# Altium PCB PCB8.PcbDoc
Units mil, origin at the board's own origin, x right, y up, seen from the top; angles counter-clockwise.
Board outline 3925 x 3930 mil, 2 copper layers (Top Layer, Bottom Layer); 49 components, 42 nets, 160 pads, 35 vias.
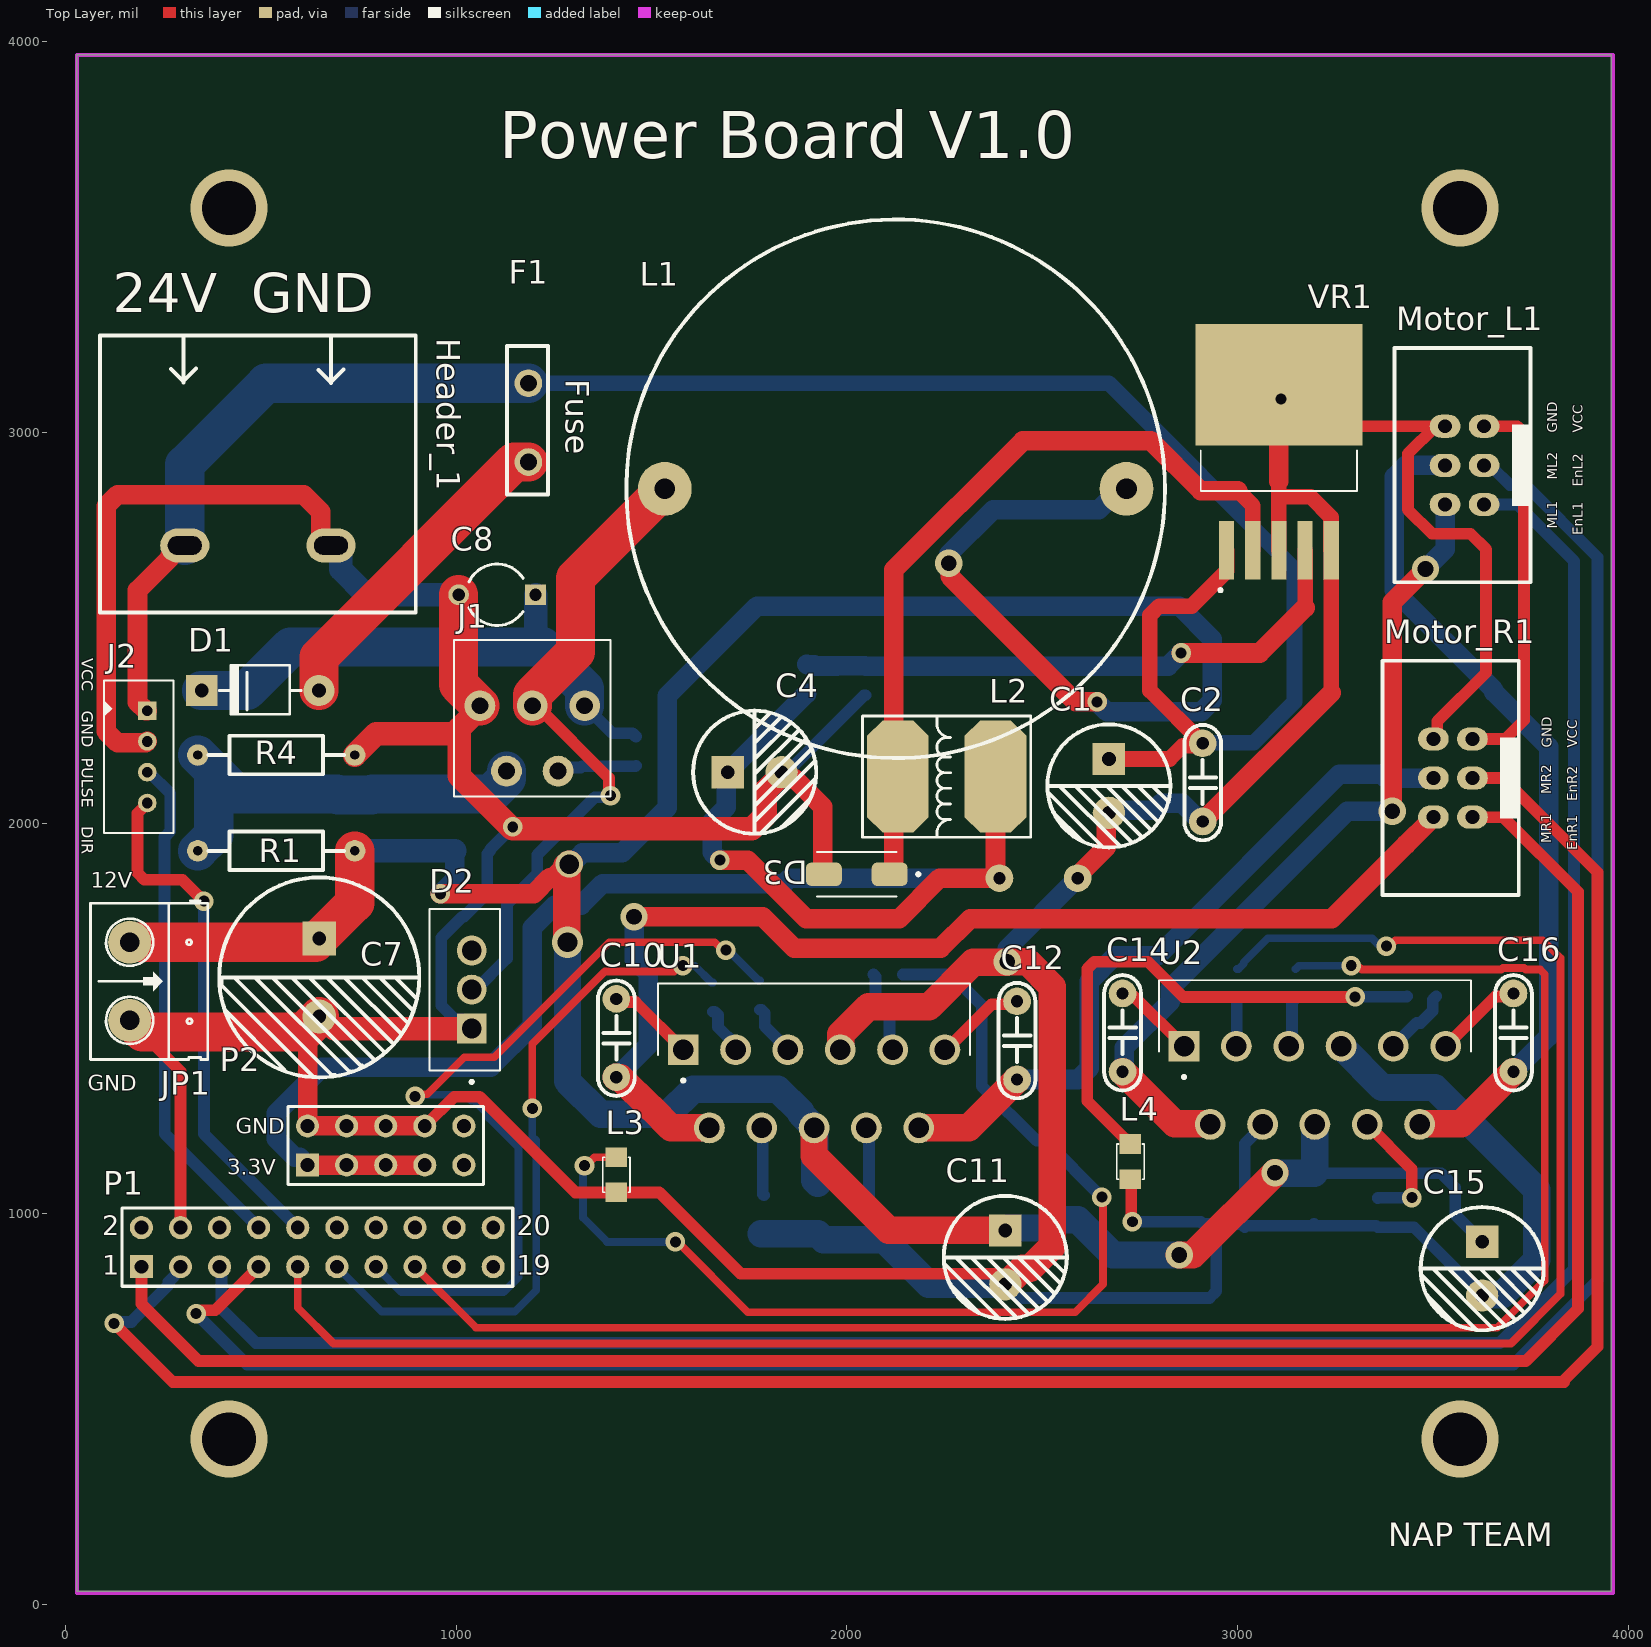
[diagram p0: Top Layer view]
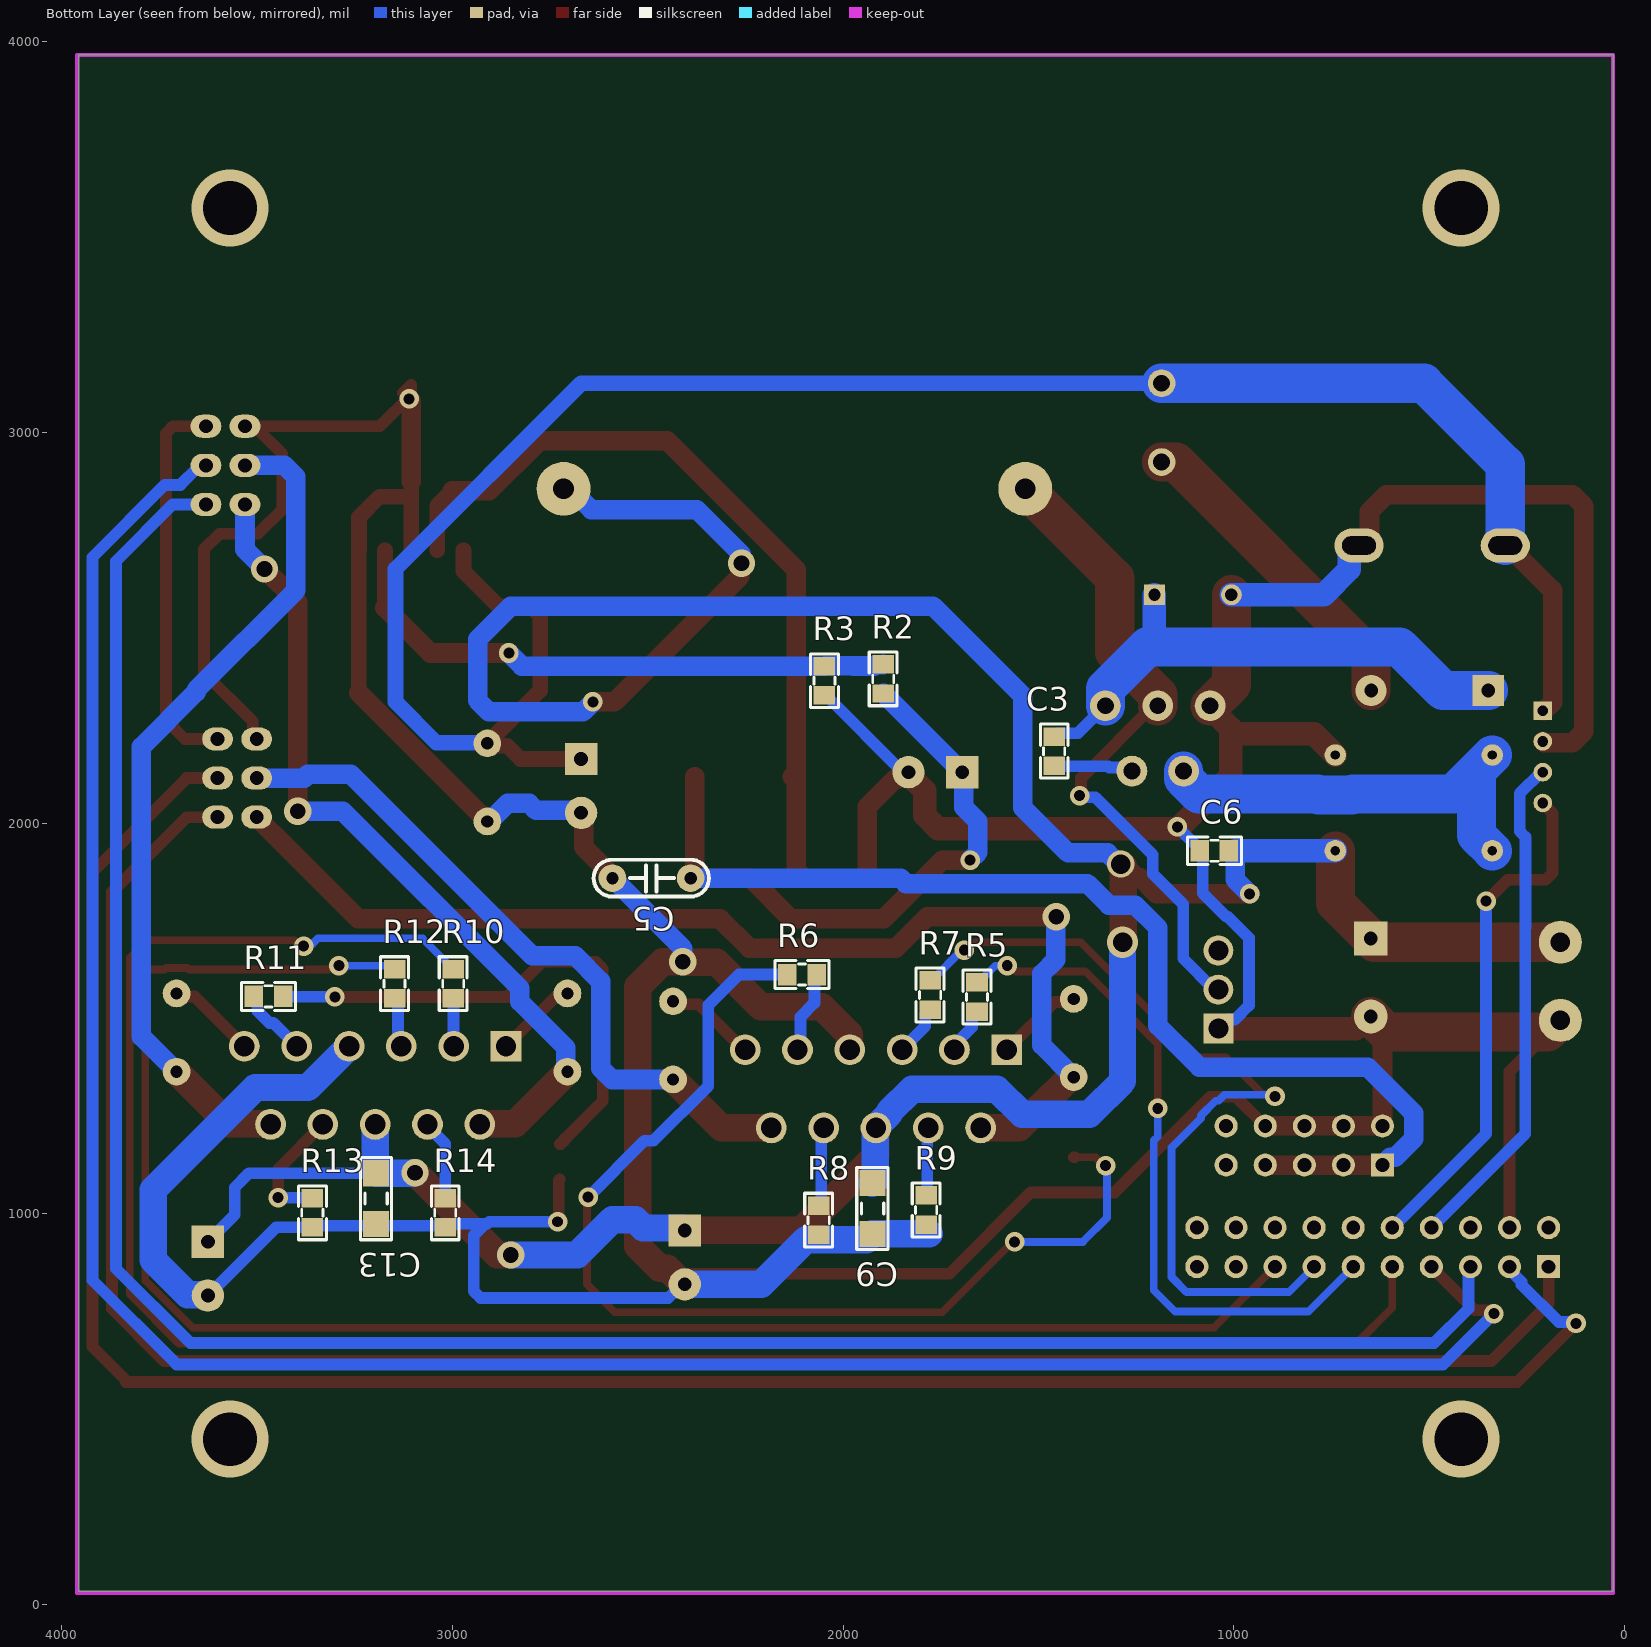
[diagram p1: Bottom Layer view, seen from below]
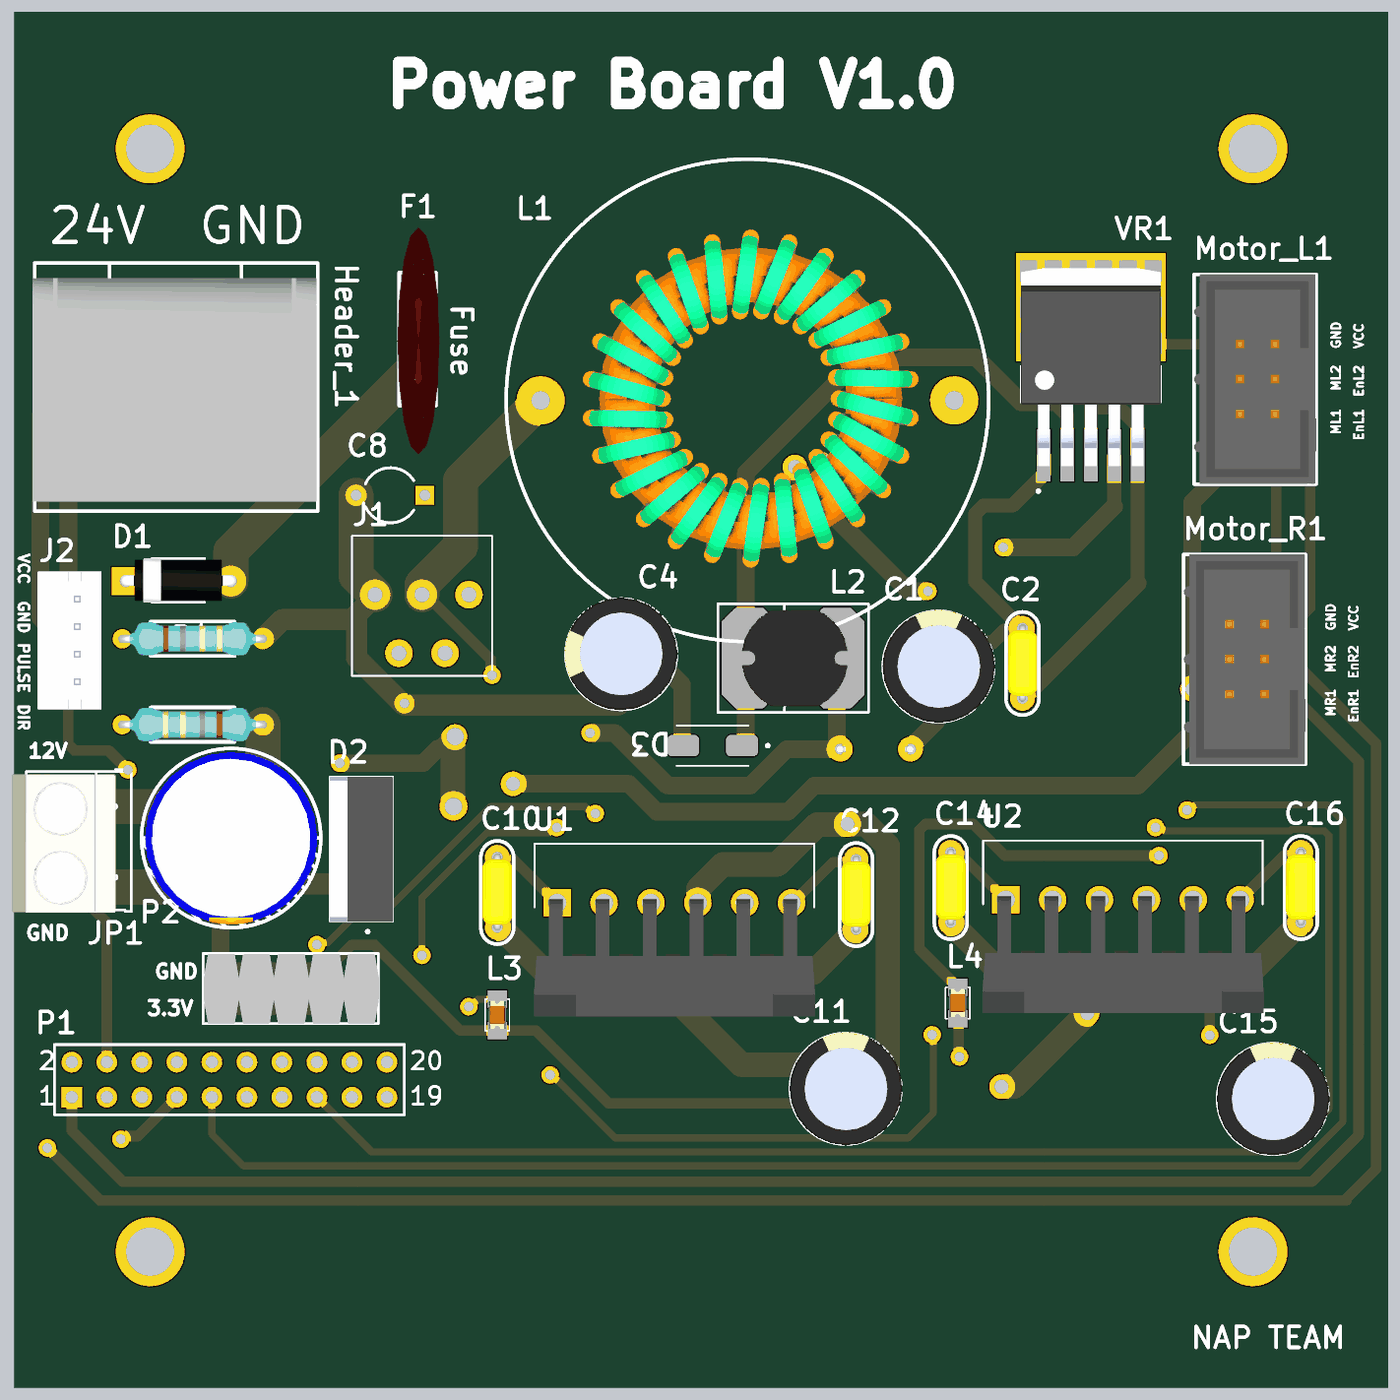
[diagram p2: 3D render of the assembled board from above, using the file's embedded part models]
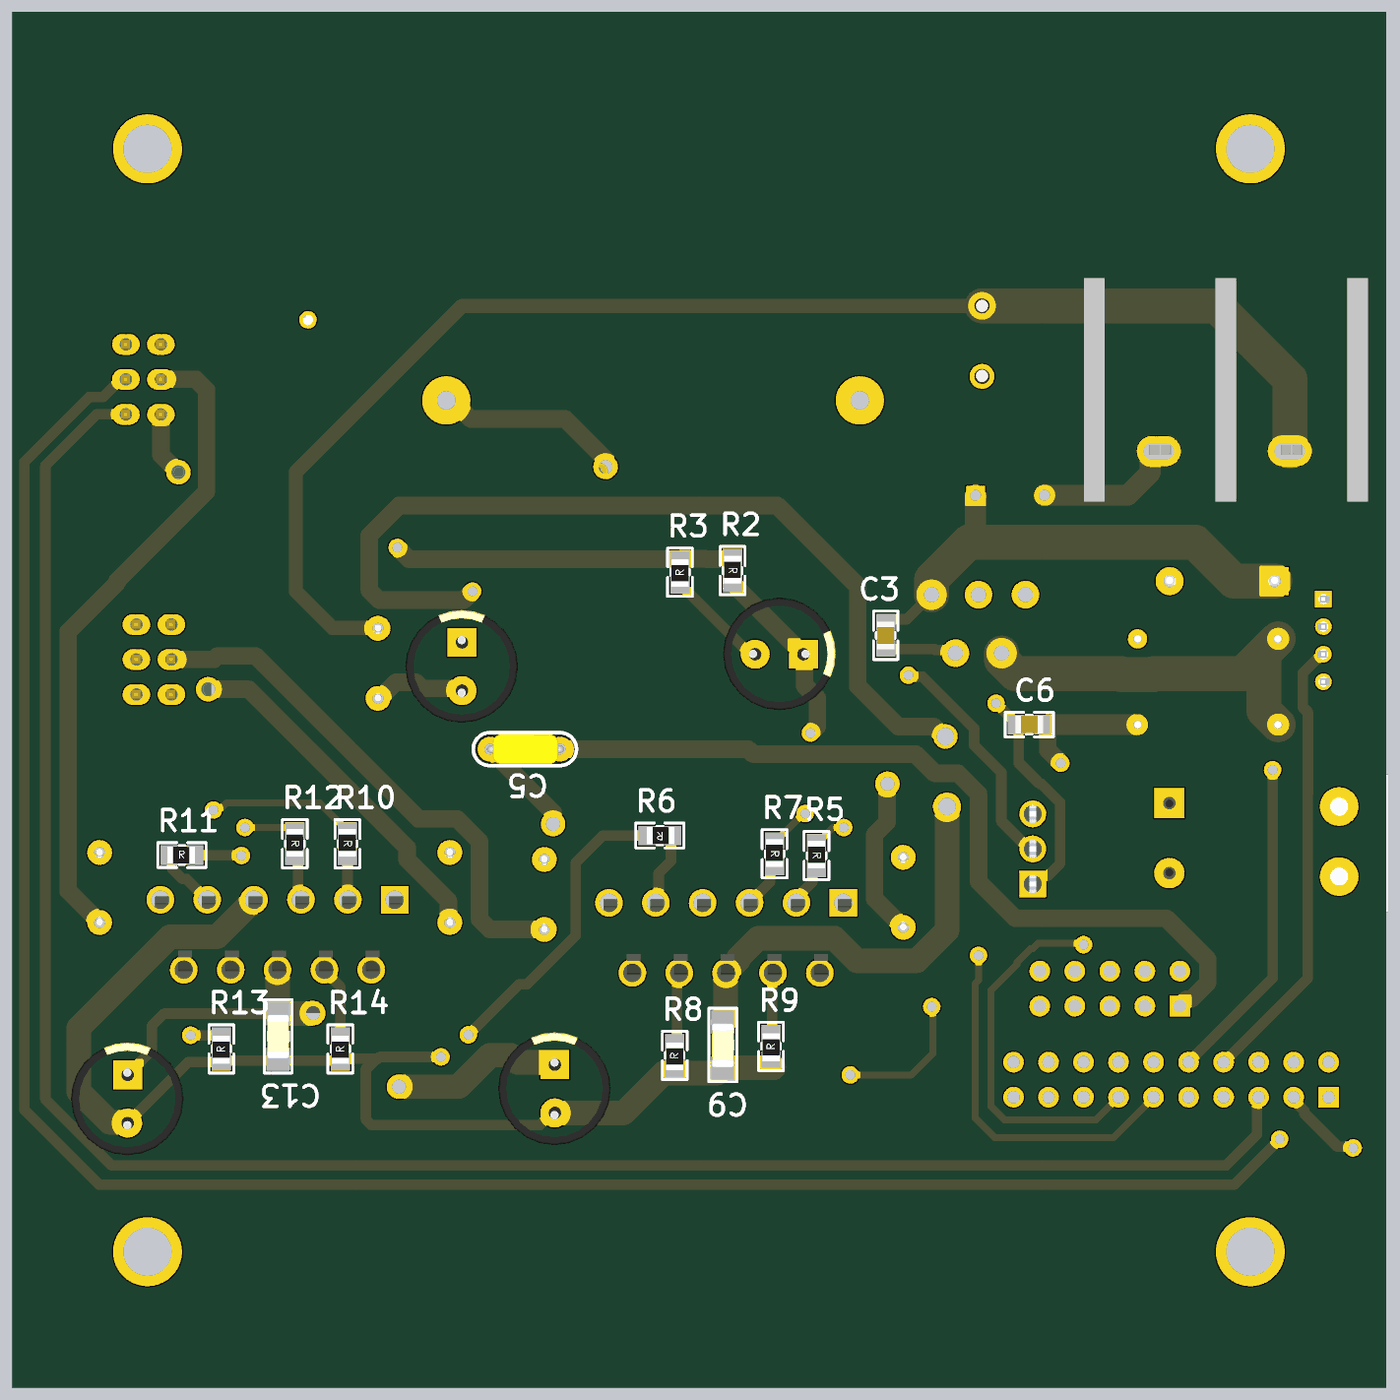
[diagram p3: 3D render of the assembled board from below, using the file's embedded part models]

## Layer stack, top to bottom
Top Solder: solder mask 0.4, Solder Resist, Dk 3.5
Top Layer: signal copper 1.4
Dielectric 1: dielectric 12.6, FR-4, Dk 4.8
Bottom Layer: signal copper 1.4
Bottom Solder: solder mask 0.4, Solder Resist, Dk 3.5

## Board outline
30,35 3955,35 3955,3965 30,3965

## Design rules (kind name [scope] priority, off if disabled: settings)
Clearance [All] p1: gap=20 ignorepadtopadclearanceinfootprint=TRUE
Height [All] p1: minheight=0 maxheight=1000 prefheight=10
PlaneClearance [All] p1: clearance=25
PolygonConnect [All] p1: connectstyle=Relief reliefconductorwidth=10 reliefentries=4 polygonreliefangle="90 Angle" airgapwidth=10
RoutingVias [All] p1: holewidth=28 width=50 viastyle="Through Hole" minholewidth=28 minwidth=50 maxholewidth=28 maxwidth=50
SolderMaskExpansion [All] p1: expansion=4 istentingtop=FALSE
Width [All] p1: maxlimit=150 minlimit=10 preferedwidth=40
28 further rules are at their usual default settings.

## Components (designator, comment, footprint, x,y, rotation, side; value= is the part's Value field where it differs from the comment)
C1 "470uF" "tu hoa 8mm" 2670,2095 r270 top
C2 "100nF" "tu tantalum dip5.08" 2910,2103.94 r270 top
C3 "105" "tu 0805" 1460,2183.94 r270 bottom
C4 "470uF" "tu hoa 8mm" 1763.9,2130 r0 top
C5 "100nF" "tu tantalum dip5.08" 2490,1858.94 r0 bottom
C6 "105" "tu 0805" 1050,1928.94 r0 bottom
C7 "1000uF" "tu hoa 13mm" 650,1605 r270 top
C8 "Cap2" CAPR5-4X5 1105,2583.94 r180 top value=470uF
C9 "100pF" "tu 1206" 1925,1013.94 r270 bottom
C10 "10nF" "tu tantalum dip5.08" 1410,1450 r270 top
C11 "220nF" "tu hoa 8mm" 2405,888.9 r270 top
C12 "10nF" "tu tantalum dip5.08" 2435,1443.94 r270 top
C13 "100pF" "tu 1206" 3195,1038.94 r270 bottom
C14 "10nF" "tu tantalum dip5.08" 2705,1463.94 r270 top
C15 "220nF" "tu hoa 8mm" 3625,860 r270 top
C16 "10nF" "tu tantalum dip5.08" 3705,1463.94 r270 top
D1 "100v" "DIODE 1A" 699.21,2338.94 r0 top
D2 "MBR10100CTH" TO254P1050X476X2020-3 1022.17,1573.94 r90 top
D3 "B340A-13-F" DIOM5226X240N 2025,1868.94 r180 top
F1 "10A 16V" Auto_Fuse 1185,3140 r270 top
Header_1 "Component_1" CONN-TH_2P-P9.50_HB9500-9.5-2P 492.99,2710 r180 top
J1 "XL4016" LM2576T2 1195,2300 r0 top
J2 "Stepper" CON4_78_B4B-PH-K-S(LF)(SN) 210,2287.48 r90 top
JP1 "Header 2_1" HED2 165,1695 r270 top value="Header 2"
L1 "330uH" IND_30.1MM_TH 1533.9,2855 r0 top
L2 "47uH SMD" "Cuon Cam 7x7x5" 2105,2118.94 r270 top
L3 "LED 0805" LED-0805-Red 1410,1145 r270 top
L4 "LED 0805" LED-0805-Red 2725,1178.94 r270 top
Motor_L1 "Polulu_854" "CON6_100_59D78_TH_ST - duplicate" 3630,2815 r270 top
Motor_R1 "Polulu_854" "CON6_100_59D78_TH_ST - duplicate" 3600,2015 r270 top
P1 "Header 10X2" HDR2X10 195,865 r0 top
P2 "Header 5X2" HDR2X5 620,1125 r0 top
R1 "15k" "tro vach 1/4w" 540,1928.94 r0 top
R2 "2.7k" "tro smd 0805" 1895,2368.94 r270 bottom
R3 "1.5k" "tro smd 0805" 2050,2363.94 r90 bottom
R4 "1.8k" "tro vach 1/4w" 540,2173.94 r180 top
R5 "3.3k" "tro smd 0805" 1655,1555 r270 bottom
R6 "330R" "Tro SMD 0805" 2105,1610 r0 bottom
R7 "3.3k" "tro smd 0805" 1775,1560 r270 bottom
R8 "10k" "tro smd 0805" 2065,983.94 r90 bottom
R9 "3.3k" "tro smd 0805" 1790,1010 r90 bottom
R10 "3.3k" "tro smd 0805" 2995,1588.94 r270 bottom
R11 "330R" "Tro SMD 0805" 3470,1558.94 r180 bottom
R12 "3.3k" "tro smd 0805" 3145,1588.94 r270 bottom
R13 "10k" "tro smd 0805" 3360,1002.83 r90 bottom
R14 "3.3k" "tro smd 0805" 3020,1002.83 r90 bottom
U1 "LMD18200T/NOPB" LMD18200 1581.14,1420 r0 top
U2 "LMD18200T/NOPB" LMD18200 2862.28,1428.94 r0 top
VR1 "LM2596S-5.0" TO170P1524X483-6N 3105,2950 r90 top

## Footprints (in the part's own frame and the unit in brackets; to place one, negate y for a bottom-side part, rotate by r counter-clockwise, add the part's x,y. Pads: shape width x height; smd on the part's side, far side on the other; paste and mask are expansions set on the pad)
Auto_Fuse [mm]
  round 1.8 hole 1.1: 1(0.381,0) 2(5.5,0)
  silkscreen extent -2.03,-1.4 7.62,1.27, body extent -5.33,-1.52 11.18,1.52, height 26.91
CAPR5-4X5 [mm] "Capacitor; 2 Leads"
  rect 1.35x1.35 hole 0.8: 1(-2.5,0)
  round 1.35 hole 0.8: 2(2.5,0)
  silkscreen extent -1.69,-2 1.82,2
CON4_78_B4B-PH-K-S(LF)(SN) [mm] "JST TH"
  rect 1.208x1.208 hole 0.7: 1(0,0)
  round 1.208 hole 0.7: 2(-2,0) 3(-4,0) 4(-6,0)
  silkscreen extent -7.95,-1.7 1.95,2.8, body extent -7.95,-1.7 1.95,2.8, height 6
"CON6_100_59D78_TH_ST - duplicate" [mm] "6 PIN IDC Straight"
  oval 1.5x2 hole 0.9: 1(0,0) 2(-2.54,0) 3(-5.08,0) 4(-5.08,-2.54) 5(-2.54,-2.54) 6(0,-2.54)
  silkscreen extent -10.16,-5.84 5.06,3.05, body extent -10.16,-5.84 5.06,3.01, height 9.17
CONN-TH_2P-P9.50_HB9500-9.5-2P [mm]
  oval 3.2x2.2 hole 1.2 slot 2.2 at 0 deg paste+0 mask+0.051: 1(4.75,0) 2(-4.75,0)
  silkscreen extent -10.26,-13.65 10.26,4.35, body extent -10.19,-12.54 10.41,3.65, height 19.04
"Cuon Cam 7x7x5" [mm] "Cuon Cam 7x7x5"
  oct 7.3x4 smd: 1(0,0.635) 2(0,6.985)
  silkscreen extent -3.94,-1.65 3.94,9.27, body extent -3.5,0.07 3.5,7.8, height 5.02
"DIODE 1A" [mil] "Diode 1A"
  round 80 hole 35: 1(-50,0)
  rect 80x80 hole 35: 2(-350,0)
  silkscreen extent -305,-61 -95,65, body extent -366,-61 -34,65, height 122
DIOM5226X240N [mm]
  rrect50% 2.33x1.55 smd: A(2.135,0) C(-2.135,0)
  silkscreen extent -4.1,-1.46 2.6,1.46
HDR2X5 [mm] "Connector; Header; 5x2 Position"
  rect 1.5x1.5 hole 0.9: 1(0,0)
  round 1.5 hole 0.9: 2(0,2.54) 3(2.54,0) 4(2.54,2.54) 5(5.08,0) 6(5.08,2.54) 7(7.62,0) 8(7.62,2.54) 9(10.16,0) 10(10.16,2.54)
  silkscreen extent -1.27,-1.27 11.43,3.81, body extent -1.22,-1.28 11.48,3.8, height 9.27
HDR2X10 [mm] "Connector; Header; 10x2 Position"
  rect 1.5x1.5 hole 0.9: 1(0,0)
  round 1.5 hole 0.9: 2(0,2.54) 3(2.54,0) 4(2.54,2.54) 5(5.08,0) 6(5.08,2.54) 7(7.62,0) 8(7.62,2.54) 9(10.16,0) 10(10.16,2.54) 11(12.7,0) 12(12.7,2.54) 13(15.24,0) 14(15.24,2.54) 15(17.78,0) 16(17.78,2.54) 17(20.32,0) 18(20.32,2.54) 19(22.86,0) 20(22.86,2.54)
  silkscreen extent -1.27,-1.27 24.13,3.81
HED2 [mil] "Header 2, 2 pin, hight 300mil, Pin to Pin 200, Colour Green"
  round 110 hole 50: 1(0,0) 2(200,0)
  silkscreen extent -106,-100 300,200, body extent -92,-140 302,155, height 394
IND_30.1MM_TH [mm]
  round 3.5 hole 1.35: 1(0,0) 2(30,0)
  silkscreen extent -2.5,-17.5 32.5,17.5, body extent 3.06,-12.14 27.42,12.39, height 14.28
LED-0805-Red [mil]
  rect 50x55 smd: 1(0,0) 2(90,0)
  silkscreen extent 0,-35 90,35, body extent 5,-25 85,25, height 43
LM2576T2 [mm]
  round 2 hole 1.1: 1(-3.404,0) 2(-1.676,-4.242) 3(0,0) 4(1.676,-4.242) 5(3.404,0)
  silkscreen extent -5.08,-5.89 5.08,4.27
LMD18200 [mm]
  rect 2x2 hole 1.33: 1(0,0)
  round 2 hole 1.33: 2(1.7,-5.08) 3(3.4,0) 4(5.1,-5.08) 5(6.8,0) 6(8.5,-5.08) 7(10.2,0) 8(11.9,-5.08) 9(13.6,0) 10(15.3,-5.08) 11(17,0)
  silkscreen extent -1.64,-2.1 18.64,4.29, body extent -1.69,-8.24 18.71,0.25, height 17.79
TO170P1524X483-6N [mm]
  rect 3.79x0.99 smd: 1(-6.4,3.4) 2(-6.4,1.7) 3(-6.4,0) 4(-6.4,-1.7) 5(-6.4,-3.4)
  rect 7.88x10.84 smd paste-6: 6(4.35,0)
  silkscreen extent -9.1,-5.08 0.09,5.08, body extent -7.18,-5.08 7.18,5.08, height 4.65
TO254P1050X476X2020-3 [mm]
  rect 1.94x1.94 hole 1.29: 1(-2.54,-0.453)
  round 1.94 hole 1.29: 2(0,-0.453) 3(2.54,-0.453)
  silkscreen extent -6.1,-2.29 5.25,2.29, body extent -5.25,-2.29 5.25,2.3, height 20.2
"tro smd 0805" [mm]
  rect 1.2x1.4 smd: 1(-0.946,-0.061) 2(0.954,-0.061)
  silkscreen extent -1.75,-0.97 1.75,0.84, body extent -1.56,-0.76 1.44,0.64, height 0.53
"Tro SMD 0805" [mm]
  rect 1.2x1.4 smd: 1(-0.946,-0.061) 2(0.954,-0.061)
  silkscreen extent -1.75,-0.97 1.75,0.84, body extent -1.56,-0.76 1.44,0.64, height 0.53
"tro vach 1/4w" [mm]
  round 1.4 hole 0.6: 1(-5.1,0) 2(5.1,0)
  silkscreen extent -4.39,-1.25 4.42,1.25, body extent -5.38,-1.2 5.38,1.2, height 2.41
"tu 0805" [mm] "Compoment SMD 80x50mil"
  rect 1.2x1.4 smd: 1(-0.946,-0.003) 2(0.954,-0.003)
  silkscreen extent -1.75,-0.89 1.75,0.89, body extent -1.01,-0.64 1.01,0.63, height 0.61
"tu 1206" [mm]
  rect 1.7x1.7 smd: 1(-1.65,0) 2(1.65,0)
  silkscreen extent -2.67,-1.02 2.67,1.02, body extent -1.57,-0.8 1.63,0.8, height 0.94
"tu hoa 8mm" [mm]
  rect 2.1x2.1 hole 0.9: 1(-1.75,0)
  round 2.1 hole 0.9: 2(1.75,0)
  silkscreen extent -4,-4 4,4, body extent -4.1,-4.07 4.1,4.13, height 13.81
"tu hoa 13mm" [mm]
  rect 2.2x2.2 hole 0.9: 1(-2.54,0)
  round 2.2 hole 0.9: 2(2.54,0)
  silkscreen extent -6.5,-6.5 6.5,6.5, body extent -6.25,-6.25 6.26,6.25, height 23.02
"tu tantalum dip5.08" [mm]
  round 1.8 hole 0.8: 1(-2.54,0) 2(2.54,0)
  silkscreen extent -3.74,-1.2 3.76,1.2, body extent -2.82,-1.08 2.77,1.08, height 6.27

## Part data
C1 C4: library part "Tu Hoa 470uF 16V 8x11", "Cắm", Chung_Loai=Cắm, Don_Vi=Con, Ma_Hang=MH006550, So_Chan=2, Ten_Linh_Kien="Tụ Hóa 470uF 16V 8x11MM"
C2 C5: library part "Tu tantalum 100nF 50V 20% DIP5.08", "Cắm", Chung_Loai=Cắm, Don_Vi=Con, Ma_Hang=MH003955, So_Chan=2, Ten_Linh_Kien="Tụ tantalum 104-100nF 50V 20% DIP5.08 (sứ vàng)(10PCS)"
C3 C6: library part "Tu 0805 105 50V 10%", "Dán", Chung_Loai=Dán, Don_Vi=Con, Ma_Hang=MH004552, So_Chan=2, Ten_Linh_Kien="Tụ 0805 105-1uF 10% 50V"
C7: library part "Tu Hoa 1000uF 50V 13x26", "Cắm", Chung_Loai=Cắm, Don_Vi=Con, Ma_Hang=MH006619, So_Chan=2, Ten_Linh_Kien="Tụ Hóa 1000uF 50V"
C8: "Capacitor", PackageDescription="Capacitor; 2 Leads", PackageReference=CAPR5-4X5, Published=23-Sep-2002, Publisher="Altium Limited"
C9 C13: library part "Tu 1206 100pF 50V 5%", "Dán", Chung_Loai=Dán, Don_Vi=Con, Ma_Hang=MH008101, So_Chan=2, Ten_Linh_Kien="Tụ 1206 100P 5% 50V"
C10 C12 C14 C16: library part "Tu tantalum 10nF DIP5.08", "Cắm", Chung_Loai=Cắm, Don_Vi=Con, Ma_Hang=MH002105, So_Chan=2, Ten_Linh_Kien="Tụ tantalum 103-10nF DIP5.08 (sứ vàng)(10PCS)"
C11 C15: library part "Tu Hoa 220uF 35V 8x12", "Cắm", Chung_Loai=Cắm, Don_Vi=Con, Ma_Hang=MH006553, So_Chan=2, Ten_Linh_Kien="Tụ Hóa 220uF 35V 8x12MM"
D1: library part "Diode 1N4007", "Cắm", Chung_Loai=Cắm, Don_Vi=Con, Ma_Hang=MH001063, Ten_Linh_Kien="Diode 1N4007 1A (DIP)"
D2: "10A, 100V, Schottky Rectifier", Package="TO-220AB Taiwan Semiconductor", Availability="Not in stock", Check_prices=https://www.snapeda.com/parts/MBR10100CTH/Taiwan+Semiconductor/view-part/?ref=eda, MF="Taiwan Semiconductor", MP=MBR10100CTH, Price=None, SnapEDA_Link=https://www.snapeda.com/parts/MBR10100CTH/Taiwan+Semiconductor/view-part/?ref=snap
D3: "Diode Schottky 40V 3A Surface Mount SMA", Package="DO-214 Diodes Inc.", Availability=Unavailable, MF="Diodes Inc.", MP=B340A-13-F, Price=None, SnapEDA_Link=https://www.snapeda.com/parts/B340A-13-F/Diodes%20Inc./view-part/78704/?ref=snap
F1: library part Auto_Fuse_10A
J1: "The XL4016 is a 180 KHz fixed frequencyPWM buck (step-down) DC/DC converter,capable of driving a 8A load with highefficiency, low ripple and excellent line and load regulation.", Package=None, Availability="Not in stock", Check_prices=https://www.snapeda.com/parts/XL4016/XLSEMI/view-part/?ref=eda, MF=XLSEMI, MP=XL4016, Price=None, SnapEDA_Link=https://www.snapeda.com/parts/XL4016/XLSEMI/view-part/?ref=snap
J2: library part CON-PLG_4X1-78-ST-TH, "Connector Header Through Hole 4 position 0.079\" (2.00mm)", Alternate Part Number-1=NA, Case/Package=TH, Crimp Part Number=ASPHSPH24K51, Manufacturer=JST, Manufacturer Part Number=B4B-PH-K-S(LF)(SN), Mating Part Number=PHR-4, Supplier Part Number-1=NA, Supplier-1="SP Road"
JP1: "Header, 2-Pin", Manufacturer="Generic Components", Class=Connector
L1: library part IND_330uH-10A-TH, "330uH-10A-CHINESE INDUCTOR", Alternate Part Number-1=NA, Case/Package=TH, Manufacturer=NA, Manufacturer Part Number=NA, Supplier Part Number-1=NA, Supplier-1="SP ROAD"
L2: library part "CUON CAM 47uH SMD", "Dán", Chung_Loai=Dán, Don_Vi=Con, Ma_Hang=MH004211, Ten_Linh_Kien="Cuộn Cảm 47uH 7x7x4MM CD74R"
L3 L4: library part "LED 0805 Do", "Dán", Chung_Loai=Dán, Don_Vi=Con, Ma_Hang=MH000897, Ten_Linh_Kien="LED 0805 Màu Đỏ (Red)"
Motor_L1 Motor_R1: library part CON-PLG_2X3-100-ST-TH, "6-pin shrouded male headers are great general-purpose connectors and are perfect for AVR ISP programming", Alternate Part Number-1=NA, Case/Package=TH, Manufacturer=NA, Manufacturer Part Number=NA, Supplier Part Number-1=Polulu_854, Supplier-1=Polulu
P1: "Header, 10-Pin, Dual row", LatestRevisionDate=17-Jul-2002, LatestRevisionNote="Re-released for DXP Platform.", Publisher="Altium Limited"
P2: "Header, 5-Pin, Dual row", LatestRevisionDate=17-Jul-2002, LatestRevisionNote="Re-released for DXP Platform.", Publisher="Altium Limited"
R1: library part "Tro Vach 1/4W 5% 15k", "Cắm", Chung_Loai=Cắm, Don_Vi=Con, Ma_Hang=MH007288, So_Chan=2, Ten_Linh_Kien="Trở Vạch 1/4w 5% 15k"
R2: library part "Tro 0805 5% 2.7k", "Dán", Chung_Loai=Dán, Don_Vi=Con, Ma_Hang=MH005238, So_Chan=2, Ten_Linh_Kien="Trở 0805 5% 2.7k"
R3: library part "Tro 0805 5% 1.5k", "Dán", Chung_Loai=Dán, Don_Vi=Con, Ma_Hang=MH005232, So_Chan=2, Ten_Linh_Kien="Trở 0805 5% 1.5k"
R4: library part "Tro Vach 1/4W 5% 1.8k", "Cắm", Chung_Loai=Cắm, Don_Vi=Con, Ma_Hang=MH007285, So_Chan=2, Ten_Linh_Kien="Trở Vạch 1/4w 5% 1.8k"
R5 R7 R9 R10 R12 R14: library part "Tro 0805 5% 3.3k", "Dán", Chung_Loai=Dán, Don_Vi=Con, Ma_Hang=MH005305, So_Chan=2, Ten_Linh_Kien="Trở 0805 5% 3.3k"
R6 R11: library part "Tro 0805 5% 330R", "Dán", Chung_Loai=Dán, Don_Vi=Con, Ma_Hang=MH005337, So_Chan=2, Ten_Linh_Kien="Trở 0805 5% 330R"
R8 R13: library part "Tro 0805 5% 10k", "Dán", Chung_Loai=Dán, Don_Vi=Con, Ma_Hang=MH005239, So_Chan=2, Ten_Linh_Kien="Trở 0805 5% 10k"
U1 U2: Package=None, Availability=Unavailable, MP=LMD18200T/NOPB, Price=None
VR1: "SIMPLE SWITCHER&reg; 4.5V to 40V, 3A Low Component Count Step-Down Regulator", Package="TO-263-5 Texas Instruments", Availability="In Stock", Check_prices=https://www.snapeda.com/parts/LM2596S-5.0/NOPB/Texas+Instruments/view-part/?ref=eda, MF="Texas Instruments", MP=LM2596S-5.0/NOPB, Price=None, Purchase-URL=https://pricing.snapeda.com/search/part/LM2596S-5.0/NOPB/?ref=eda, SnapEDA_Link=https://www.snapeda.com/parts/LM2596S-5.0/NOPB/Texas+Instruments/view-part/?ref=snap

## Via types
v1: diameter 50, hole 28, Top Layer to Bottom Layer, 22 vias
v2: diameter 70, hole 40, Top Layer to Bottom Layer, 7 vias
v3: diameter 196.85, hole 137.8, Top Layer to Bottom Layer, 4 vias
v4: diameter 80, hole 50, Top Layer to Bottom Layer, 1 vias
v5: diameter 70, hole 50, Top Layer to Bottom Layer, 1 vias

## Nets (pads, with @x,y where several pads share a name; then routed paths per layer and width w, separated by ;. In a path a pad name is that pad's centre, name@x,y a point inside that pad or via, vN(x,y) a via of type N, cw(c..) or ccw(c..) an arc to the next point about the centre after c; other vN are vias at no path point)
3.3V: C4.1 C5.1 L2.2 P2.1 P2.3 P2.5 P2.7 R2.2 | length 4540.2
  Top Layer w50: P2.1 P2.3 P2.7 ; v1(1675,1905) 1746.07,1905 1896.07,1755 2133.27,1755 2237.21,1858.94 C5.1 2390,1864.58 2380,1874.58 L2.2 ; P2.7 P2.5 P2.7
  Bottom Layer w50: P2.1 599.53,1145.47 587.06,1145.47 540.47,1192.06 540.47,1257.94 658.03,1375.5 1088.65,1375.5 1195,1481.85 1195,1732.28 1252.72,1790 1320,1790 1375,1845 1839.07,1845 1853.01,1858.94 C5.1 ; v1(1675,1905) 1655,1925 1655,2003.94 1691.71,2040.65 1691.71,2126.71 C4.1 ; C4.1@1698.05,2126.95 1712.44,2141.34 1712.44,2147.59 1894.83,2329.98 1896.21,2331.36 R2.2
+12: C6.1 C7.1 C9.1 C11.1 C13.1 C15.1 JP1.1 L1.2 R1.2 U1.6 U2.6 | length 8856.1
  Top Layer w50: v1(960,1818.94) 1198.43,1818.94 1239.57,1860.07 1249.16,1860.07 1284.09,1895 v5(1289.5,1895) ; v2(2260,2665) 2263.83,2661.17 2263.83,2631.17 2585,2310 v1(2640,2310)
  Top Layer w70: v4(1285,1695) 1285,1697.71 1283.52,1699.19 1283.52,1889.02 v5(1289.5,1895) ; U1.6 1915.79,1149.21 2107.2,957.8 C11.1 ; v2(2850,895) 2885,895 v2(3095,1105)
  Top Layer w100: JP1.1 640,1695 C7.1 740.79,1795.79 R1.2
  Bottom Layer w30: C13.1 3520,1103.9 3556.23,1067.66 3556.23,997.66 C15.1
  Bottom Layer w50: v1(960,1818.94) 996.95,1855.89 C6.1@996.95,1928.94 ; v5(1289.5,1895) 1294.91,1895 1323.34,1923.43 1424.5,1923.43 1540,2038.94 1540,2325 1770,2555 2850,2555 2935,2470 2935,2313.66 2905.71,2284.37 2665.63,2284.37 v1(2640,2310) ; v2(2260,2665) 2260,2687.57 2374.29,2801.86 2644.16,2801.86 2697.31,2855 L1.2
  Bottom Layer w60: R1.2 C6.1@996.95,1928.94
  Bottom Layer w70: v4(1285,1695) 1285,1340.04 1370.47,1254.57 1542.11,1254.57 1606.91,1319.37 1823.09,1319.37 1881.3,1261.16 1881.3,1256.85 1915.79,1222.37 U1.6 1917.46,1218.33 1917.46,1086.44 C9.1 ; C11.1 2411.34,964.13 2511.14,964.13 2532.01,985 2590,985 2680,895 v2(2850,895) ; v2(3095,1105) 3100,1105 3101.1,1103.9 C13.1 3196.93,1105.83 U2.6
DIR_L: P1.9 R10.1 | length 5180.9
  Top Layer w20: P1.9 595,760 686.34,668.66 3698.66,668.66 3825,795 3825,1655 3780,1700 3403.12,1700 3388.12,1685 v1(3380,1685)
  Bottom Layer w20: R10.1 3001.33,1626.17 3014.95,1639.79 3014.95,1643.72 3076.23,1705 3343.28,1705 3357.54,1690.74 3374.26,1690.74 v1(3380,1685)
DIR_R: P1.11 R5.1 | length 1777.3
  Top Layer w20: v1(1195,1270) 1195,1434.61 1380.83,1620.43 1557.32,1620.43 1571.88,1635 v1(1580,1635)
  Bottom Layer w20: P1.11 810,750 1150,750 1205,805 1205,1187.82 1195,1197.82 v1(1195,1270) ; v1(1580,1635) 1610.68,1635 1653.46,1592.23 R5.1
DIR_STEPPER: J2.4 P1.10 | length 1323.5
  Top Layer w30: J2.4 210,2049.91 185,2024.91 185,1872.57 202.57,1855 300,1855 v1(355,1800)
  Bottom Layer w30: v1(355,1800) 355,1205 P1.10
Encoder_L1: Motor_L1.1 P1.5 | length 5784
  Bottom Layer w30: P1.5 400,860 400,757.78 487.78,670 3670,670 3860,860 3860,2669.37 3714.37,2815 Motor_L1.1
Encoder_L2: Motor_L1.2 P1.7 | length 6175
  Top Layer w30: v1(335,745) 340.41,745 349.24,753.83 383.83,753.83 P1.7
  Bottom Layer w30: v1(335,745) 465,615 3705,615 3920,830 3920,2680.08 3735.08,2865 3695.24,2865 3652.03,2908.21 3636.79,2908.21 Motor_L1.2
Encoder_R1: Motor_R1.1 P1.1 | length 5301.8
  Top Layer w30: P1.1 195,770 341.34,623.66 3736.09,623.66 3870,757.57 3870,1824.37 3679.37,2015 Motor_R1.1
Encoder_R2: Motor_R1.2 P1.3 | length 5777.7
  Top Layer w30: v1(125,720) 275,570 3835,570 ; Motor_R1.2@3595,2115 3679.37,2115 3920,1874.37 3920,660 3830,570
  Bottom Layer w30: v1(125,720) 128.83,723.83 169.45,723.83 264.53,818.9 264.53,826.67 295,857.14 P1.3
GND: C1.2 C2.2 C4.2 C5.2 C6.2 C7.2 C8.2 C9.2 C11.2 C13.2 C15.2 D2.1 D3.A Header_1.2 J1.1 J2.2 JP1.2 L3.2 L4.2 Motor_L1.4 Motor_R1.4 P1.4 P2.2 P2.4 P2.6 P2.8 R3.1 R4.1 R8.1 R9.1 R13.1 R14.1 U1.7 U2.7 VR1.3 VR1.5 VR1.6 | length 17318.4
  Top Layer w30: JP1.2 295,1365 P1.4 ; P2.8 995,1300 1060.15,1300 1305.15,1055 L3.2 1520,1055 1727.8,847.2 C11.2@2385,847.2 ; L4.2 2727.5,1086.44 2727.5,982.5 v1(2730,980) ; VR1.6@3125.63,3100.63 VR1.6 3105,3095 3185,3015 Motor_L1.4@3505.63,3015 ; Motor_R1.4 3510.12,2225.12 3510.12,2260.12 3635,2385 3635,2700 3595,2740 3496.83,2740 3435,2801.83 3435,2944.37 Motor_L1.4@3505.63,3015 ; Motor_L1.4 Motor_L1.4@3505.63,3015
  Top Layer w40: VR1.3 3105,2835 ; 3105,2874.29 3105,2835 ; 3238.86,2332.8 VR1.5 3238.35,2698.54 3238.35,2782.28 3185.62,2835 3105,2835
  Top Layer w50: J2.2 206.26,2205 134.29,2205 105,2234.29 105,2810.71 134.29,2840 610,2840 653.31,2796.69 653.31,2726.91 670.22,2710 Header_1.2 ; 620,1465.09 P2.2 P2.4 P2.6 P2.8 ; C4.2 1841.64,2130 1857.98,2113.66 1866.34,2113.66 1937.8,2042.2 1937.8,1874.45 1940.94,1871.3 D3.A ; C5.2 2590,1864.58 2663.75,1938.33 2663.75,2019.85 C1.2 ; C2.2 3238.86,2332.8 ; 3105,2874.29 3105,3080 v1(3110,3085)
  Top Layer w60: C7.2 657.2,1505 688.26,1473.94 D2.1 ; R4.1 795.79,2228.94 1008,2228.94 ; J1.1 1061,2294.93 1008,2241.93 1008,2228.94 ; v1@1141.77,1986.77 1008,2120.54 1008,2228.94 ; v1@1145,1985 1756.19,1985 1791.34,2020.15 1791.34,2082.41 1832.8,2123.86 C4.2
  Top Layer w70: U1.7 1984.39,1421.67 1984.39,1459.39 2055,1530 2210,1530 2323.43,1643.43 v2@2410,1643.43 ; C11.2 2408.43,820 2449.89,861.46 2469.12,861.46 2525.43,917.77 2525.43,1581.4 2461.83,1645 v2(2410,1645)
  Top Layer w100: JP1.2 167.71,1495 197.71,1465 610,1465 C7.2 ; C8.2 1006.57,2354.43 J1.1
  Bottom Layer w30: D2.1 1016.81,1497.13 997.87,1497.13 961.81,1533.19 961.81,1706.32 1015.49,1760 1020,1760 1080,1820 1080,1921.5 C6.2 1087.57,1933.01 1144.57,1990 v1(1145,1990) ; C4.2 1846.96,2130 2043.67,2326.71 R3.1 ; C11.2 2412.2,820 2447.2,785 2927.43,785 2945,802.57 2945,945 2915,975 ; v1(2730,980) 2905,980 ; 2910,975 2987.47,975 2988.25,974.23 3008.98,974.23 R14.1 3021.79,969.79 3190.82,969.79 C13.2 3199.18,969.79 3353.42,969.79 R13.1 3450.5,965.61 C15.2
  Bottom Layer w50: v2(2410,1645) 2410,1678.94 C5.2 ; C1.2 2676.25,2032.35 2785.09,2032.35 2802.78,2050.04 2858.25,2050.04 2904.35,2003.94 C2.2
  Bottom Layer w60: Header_1.2 692.48,2710 704.77,2697.71 704.77,2648.93 769.77,2583.94 C8.2
  Bottom Layer w70: 1779.96,948.98 C9.2 1940.04,933.94 2095,933.94 2208.94,820 C11.2 ; U2.7 3369.49,1323.31 3503.74,1323.31 3765,1062.04 3765,882.11 3676.42,793.53 3627.43,793.53 C15.2
ML1: C14.2 Motor_L1.6 U2.2 | length 2135.3
  Top Layer w50: v2@3397.71,2036.53 3395,2039.24 3395,2565 v2(3480,2650)
  Top Layer w70: C14.2 2838.33,1230.61 2927.54,1230.61 U2.2
  Bottom Layer w50: C14.2 2708.99,1367.93 2708.99,1425.1 2827.06,1543.17 2827.06,1577.73 3279.34,2030 v2(3395,2030) ; v2(3480,2650) 3530,2700 Motor_L1.6
ML2: C16.2 Motor_L1.5 U2.10 | length 2161.1
  Top Layer w70: U2.10 3466.32,1230.61 3571.67,1230.61 C16.2
  Bottom Layer w50: Motor_L1.5 3429.29,2915 3400,2885.71 3400,2595 3655,2340 3655,2335 3795,2195 3795,1453.94 C16.2
MR1: C10.2 Motor_R1.6 U1.2 | length 2972.4
  Top Layer w50: v2(1455,1760) 1785,1760 1865,1680 2239.79,1680 2314.79,1755 3240,1755 3430,1945 3430.21,1945 3488.42,2003.22 3488.42,2010.82 3492.61,2015 Motor_R1.6
  Top Layer w70: C10.2 1411.06,1348.94 1420,1348.94 1420.23,1348.94 1499.17,1270 1500.28,1270 1549.67,1220.61 1647.46,1220.61 U1.2
  Bottom Layer w50: C10.2 1491.77,1431.77 1491.77,1614.38 1456.16,1650 1456.16,1758.84 v2(1455,1760)
MR2: C12.2 Motor_R1.5 U1.10 | length 1825.4
  Top Layer w70: U1.10 2311.06,1220 C12.2
  Bottom Layer w50: C12.2 2590.71,1343.94 2620,1373.23 2620,1595 2685,1660 2795,1660 3260,2125 3368.85,2125 3378.85,2115 Motor_R1.5
NetC3_1: C3.1 C8.1 D1.2 J1.5 | length 1429.6
  Bottom Layer w30: J1.5 1399.21,2229.79 1451.51,2229.79 C3.1
  Bottom Layer w60: 1203.43,2450.94 C8.1
  Bottom Layer w100: D1.2 465.53,2338.94 576.59,2450 1222.44,2450 ; 1203.43,2450.94 1221.5,2450.94 1329,2343.44 J1.5
NetC3_2: C3.2 J1.4 | length 204.7
  Bottom Layer w30: J1.4 1270.33,2142.33 1319.27,2142.33 1321.94,2145 1458.77,2145 C3.2
NetC10_1: C10.1 U1.1 | length 225
  Top Layer w30: C10.1 1417.82,1542.18 1458.96,1542.18 U1.1
NetC12_1: C12.1 U1.11 | length 235.9
  Top Layer w30: U1.11 2253.78,1420 2369.9,1536.12 2427.18,1536.12 C12.1
NetC14_1: C14.1 U2.1 | length 213.2
  Top Layer w30: C14.1 2712.82,1556.12 2735.1,1556.12 U2.1
NetC16_1: C16.1 U2.11 | length 229.3
  Top Layer w30: U2.11 3658.76,1556.12 3697.18,1556.12 C16.1
NetD1_1: D1.1 F1.2 | length 827.9
  Top Layer w100: D1.1 649.21,2424.21 1148.46,2923.46 F1.2
NetD2_2: D2.2 J1.3 L1.1 | length 1685.5
  Top Layer w30: J1.3 1206.25,2300 1391.17,2115.07 1391.17,2073.83 v1(1395,2070)
  Top Layer w100: J1.3 1195,2327.74 1305,2437.74 1305,2626.1 L1.1
  Bottom Layer w30: D2.2 1050.58,1573.94 1130,1653.36 1130,1792.22 1207.52,1869.74 1207.52,1919.09 1354.6,2066.17 1391.17,2066.17 v1(1395,2070)
NetD3_C: D3.C L2.1 VR1.2 | length 2028
  Top Layer w40: 3000,2850 3038.07,2811.93 VR1.2
  Top Layer w50: D3.C 2114.02,1868.94 2119.53,1874.45 2119.53,2108.46 L2.1 ; L2.1@2120,2118.94 2120,2648.14 2449.7,2977.83 2777.17,2977.83 2905,2850 3000,2850
NetJ1_2: J1.2 R1.1 R4.2 | length 1090.1
  Bottom Layer w100: R1.1 380,1969.72 380,2133.15 ; R4.2 380,2133.15 ; J1.2 1129,2113.96 1089.42,2074.38 786.27,2074.38 783.27,2071.38 698.31,2071.38 695.31,2074.38 438.77,2074.38 380,2133.15
NetL3_1: L3.1 R6.2 | length 2777
  Top Layer w20: v1(1328.54,1123.54) 1332.64,1123.54 1354.11,1145 L3.1@1407.5,1145 ; v1(1561.11,928.55) 1562.56,930 1565,930 1746.34,748.66 2583.66,748.66 2655,820 2655,1040.21 v1(2652,1043.21)
  Top Layer w30: L3.1@1407.5,1145 L3.1
  Bottom Layer w20: v1(1328.54,1123.54) 1325,1120 1325,990 1386.45,928.55 v1(1561.11,928.55)
  Bottom Layer w30: R6.2 2266.94,1612.39 2345.1,1534.23 2345.1,1327.15 2485.16,1187.1 2508.11,1187.1 v1(2652,1043.21)
NetL4_1: L4.1 R11.2 | length 1358.1
  Top Layer w30: L4.1 2722.5,1178.94 2712.5,1188.94 2712.5,1191.44 2615,1288.94 2615,1627.43 2632.57,1645 2770,1645 2860,1555 v1(3300,1555)
  Bottom Layer w30: v1(3300,1555) 3300.77,1555.77 3431.65,1555.77 R11.2
NetR2_1: R2.1 R3.2 VR1.4 | length 1483.2
  Top Layer w40: 3171.93,2551.22 VR1.4
  Top Layer w50: v1(2855,2435) 3055.71,2435 3171.93,2551.22
  Bottom Layer w50: R2.1 1898.77,2404.79 1916.55,2404.79 1919.65,2401.68 1974.09,2401.68 1975.3,2402.89 R3.2@2045.05,2402.89 ; R3.2 2821.51,2401.51 v1(2855,2435)
NetR5_2: R5.2 U1.3 | length 123.6
  Bottom Layer w30: R5.2 1661.33,1517.43 1669.95,1508.8 1669.95,1478.24 1715,1433.19 U1.3
NetR6_1: R6.1 U1.9 | length 212.6
  Bottom Layer w30: R6.1 2073.16,1607 2073.16,1539.83 2108.63,1504.37 2108.63,1427.95 U1.9
NetR7_2: R7.2 U1.5 | length 134.3
  Bottom Layer w30: R7.2 1781.33,1522.43 1789.95,1513.8 1789.95,1480.41 1848.86,1421.51 U1.5
NetR8_2: R8.2 U1.8 | length 203.9
  Bottom Layer w30: U1.8 2056.13,1213.52 2056.13,1027.99 R8.2
NetR9_2: R9.2 U1.4 | length 174.8
  Bottom Layer w30: U1.4 1784.77,1217.16 1784.77,1050.41 R9.2
NetR10_2: R10.2 U2.3 | length 122.9
  Bottom Layer w30: U2.3 2996.77,1429.56 2996.77,1550.74 R10.2
NetR11_1: R11.1 U2.9 | length 179.2
  Bottom Layer w30: U2.9 3457.38,1488.6 3467.98,1488.6 3498.61,1519.22 3498.61,1547.92 R11.1
NetR12_2: R12.2 U2.5 | length 129.7
  Bottom Layer w30: U2.5 3138.7,1437.63 3138.7,1542.74 3147.32,1551.36 R12.2
NetR13_2: R13.2 U2.8 | length 322.4
  Top Layer w30: U2.8 3445,1114.72 v1(3445,1041.9)
  Bottom Layer w30: R13.2 3358.35,1041.15 3444.26,1041.15 v1(3445,1041.9)
NetR14_2: R14.2 U2.4 | length 207.4
  Bottom Layer w30: R14.2 3017.61,1179.6 3063.07,1225.06 U2.4
Pin_24V: C1.1 C2.1 F1.1 Header_1.1 J2.1 VR1.1 | length 5389.3
  Top Layer w40: C1.1 2825.33,2163.9 2859.46,2198.03 2904.09,2198.03 C2.1 2775,2338.94 2775,2531.57 2798.43,2555 2882.2,2555 2971.14,2643.94 VR1.1
  Top Layer w50: J2.1 206.26,2287.48 185,2308.74 185,2595 267.99,2677.99 267.99,2681.79 296.2,2710 Header_1.1
  Bottom Layer w40: F1.1 2670,3125 3145,2650 3145,2310 3040,2205 C2.1@2895.74,2205
  Bottom Layer w100: Header_1.1 305.98,2916.69 514.29,3125 F1.1
PULSE_STEPPER: J2.3 P1.8 | length 1297.7
  Bottom Layer w30: J2.3 214.39,2130 268.78,2075.61 268.78,1978.71 254.21,1964.15 254.21,1733.07 255,1732.28 255,1205 P1.8
PWML: P1.15 R12.1 | length 4442.2
  Top Layer w20: P1.15 1051.34,708.66 3663.66,708.66 3785,830 3785,1613.28 3773.28,1625 3736.47,1625 3732.1,1629.37 3677.9,1629.37 3673.53,1625 3316.72,1625 3312.46,1629.26 3295.74,1629.26 v1(3290,1635)
  Bottom Layer w20: R12.1 3156.23,1635 v1(3290,1635)
PWMR: P1.13 R7.1 | length 2152
  Top Layer w20: v1(895,1300.5) 900.74,1306.24 926.24,1306.24 1020.75,1400.75 1097.5,1400.75 1391.75,1695 1661.88,1695 1681.88,1675 v1(1690,1675)
  Bottom Layer w20: P1.13 860,800 1121.26,800 1160,838.74 1160,1169.18 1084.53,1244.66 1084.53,1251.73 1046.73,1289.53 1039.66,1289.53 1024.18,1305 899.5,1305 v1(895,1300.5) ; v1(1690,1675) 1695.68,1675 1773.46,1597.23 R7.1
VCC: Motor_L1.3 Motor_R1.3 | length 995.7
  Top Layer w30: Motor_R1.3 3684.37,2215 3731.94,2262.57 3731.94,2997.43 3714.37,3015 Motor_L1.3
pads on no net: D2.3 P1.2 P1.6 P1.12 P1.14 P1.16 P1.17 P1.18 P1.19 P1.20 P2.9 P2.10
copper on no net:
  other v3: 418.7,423.7 3568.31,423.7 418.7,3573.31 3568.31,3573.31

## Polygon pours and split planes (outlines as drawn)
GND on Top Layer "GND_L01_P000" (solid, pour order 0): 4860,8677.94 8790,8677.94 8790,4742.94 8785,4737.94 4860,4737.94
GND on Bottom Layer "GND_L02_P001" (solid, pour order 1): 5010,4042.94 8940,4042.94 8940,112.94 5015,112.94 5010,107.94

## Keep-outs
Keep-Out Layer:
  lines w10: 30,30 3960,30 3960,3965 30,3965 30,30

## Silkscreen, mask and mechanical layers (free items; w line width, h text height)
Top Overlay:
  text "Power Board V1.0" at 1110.3,3700 h120
  text "24V  GND" at 122,3307 h100
  text "GND" at 3817.53,2998 h25 r90
  text "VCC" at 3882.53,2998 h25 r90
  text "ML2" at 3817,2878 h25 r90
  text "EnL2" at 3882.53,2860.67 h25 r90
  text "ML1" at 3817,2753 h25 r90
  text "EnL1" at 3882.53,2735.67 h25 r90
  text "VCC" at 43,2422 h30 r270
  text "GND" at 43,2287 h30 r270
  text "GND" at 3802.53,2193 h25 r90
  text "VCC" at 3867.53,2193 h25 r90
  text "PULSE" at 43,2167 h30 r270
  text "MR2" at 3802,2073 h25 r90
  text "EnR2" at 3867.53,2055.67 h25 r90
  text "DIR" at 43,1992 h30 r270
  text "MR1" at 3802,1948 h25 r90
  text "EnR1" at 3867.53,1930.67 h25 r90
  text "12V" at 65,1835 h40
  text "GND" at 58.34,1315 h40
  text "GND" at 436.68,1205 h40
  text "3.3V" at 415.02,1100 h40
  text "NAP TEAM" at 3385,150 h60

## Text inside footprints (layer, text, board x,y; h text height)
F1: Top Overlay "Fuse" at 1280,3135 h60 r270
P1: Top Overlay "20" at 1155,945 h50; Top Overlay "19" at 1155,845 h50; Top Overlay "1" at 95,845 h50; Top Overlay "2" at 95,945 h50